# Altium PCB 主板-20190829.PcbDoc (part 1 of 6)
Units mm, origin at the board's own origin, x right, y up, seen from the top; angles counter-clockwise.
Board outline 97.69 x 103.45 mm, 2 copper layers (Top Layer, Bottom Layer); 77 components, 70 nets, 247 pads, 251 vias.
Unrouted connection lines stored in the file: 4.
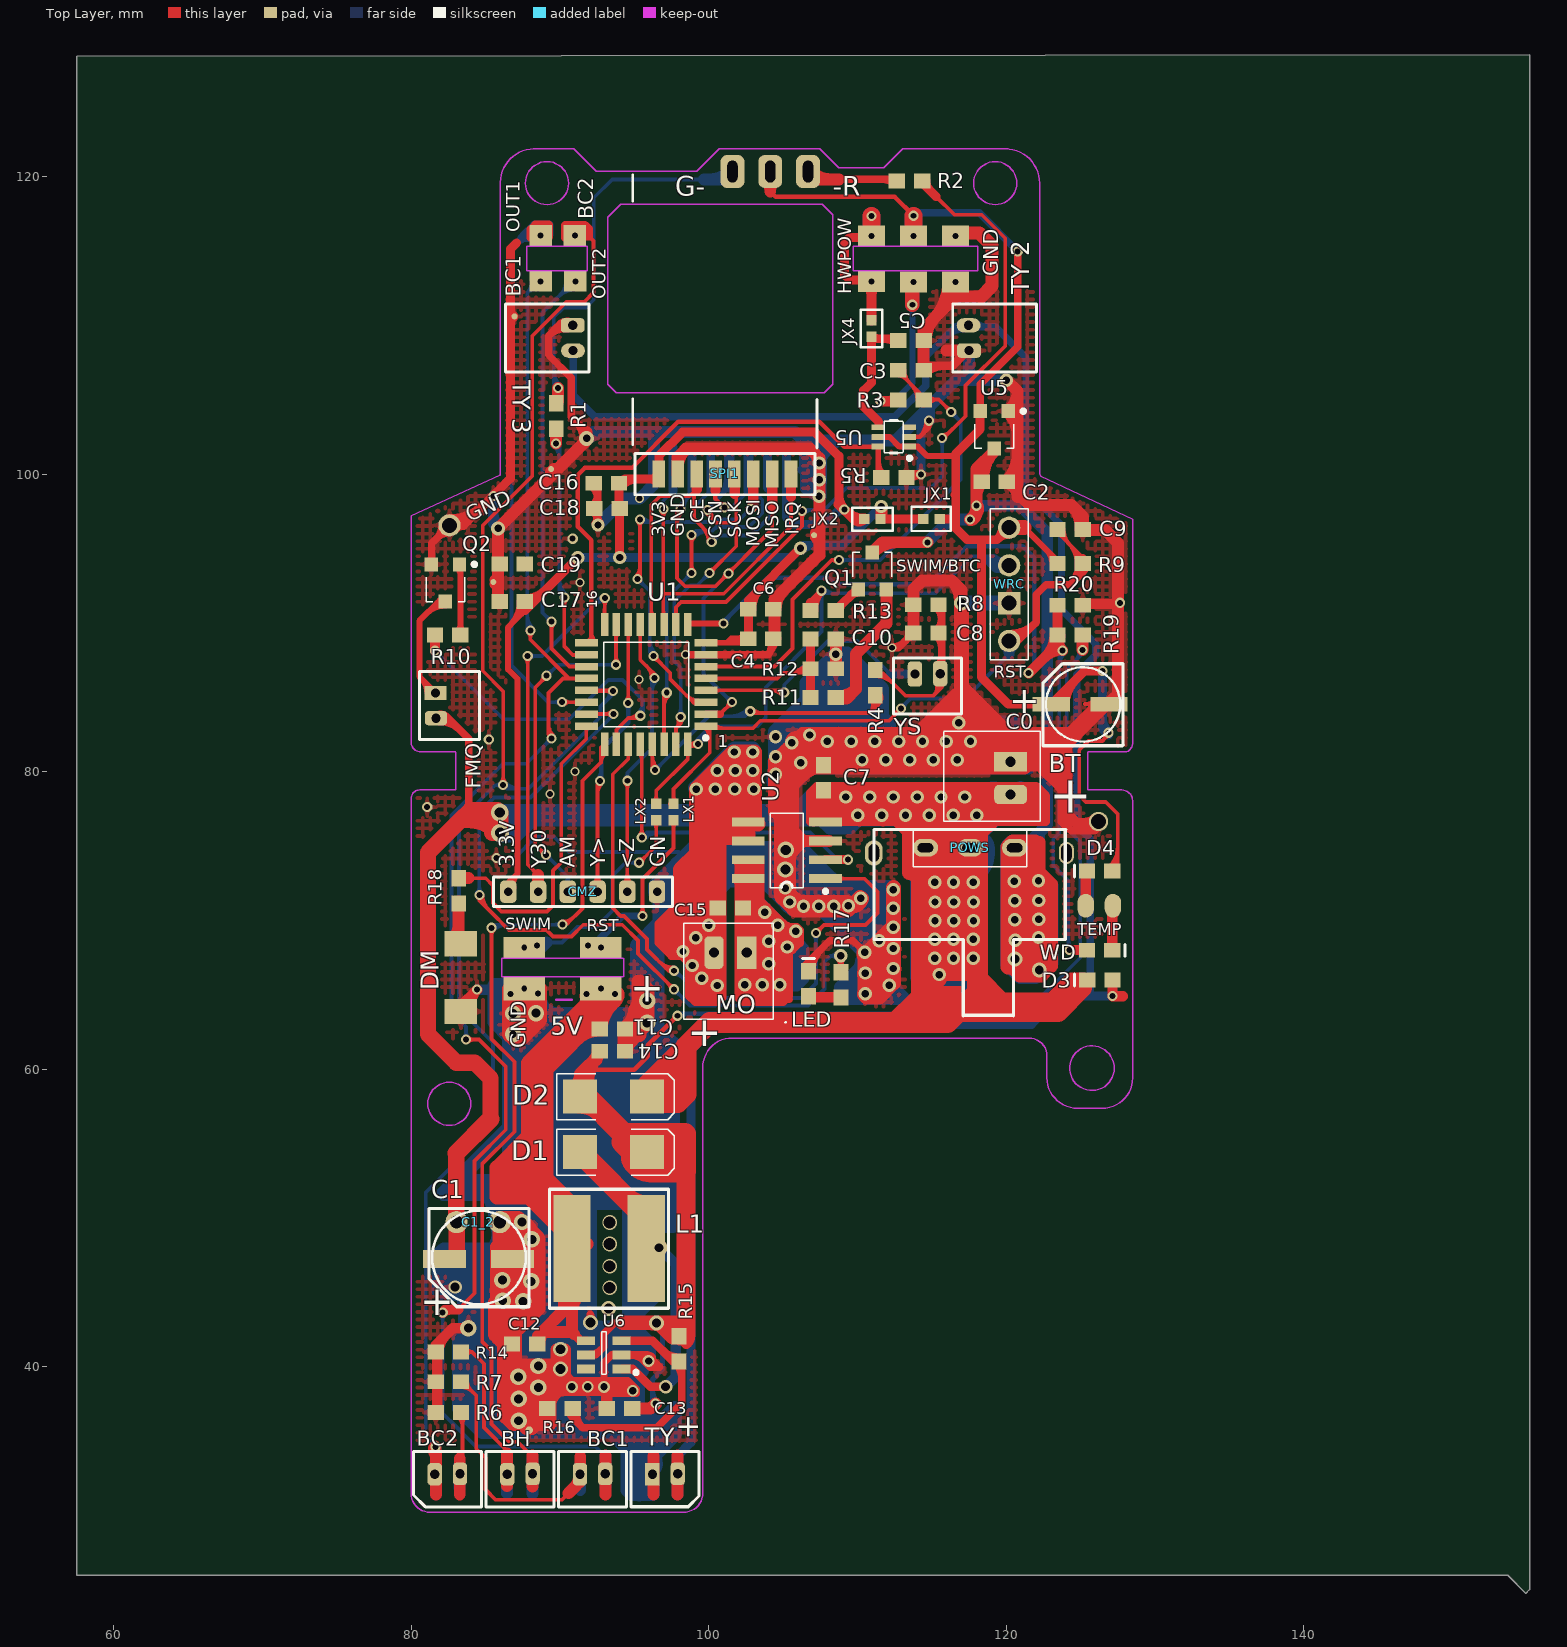
[diagram p0: Top Layer view]
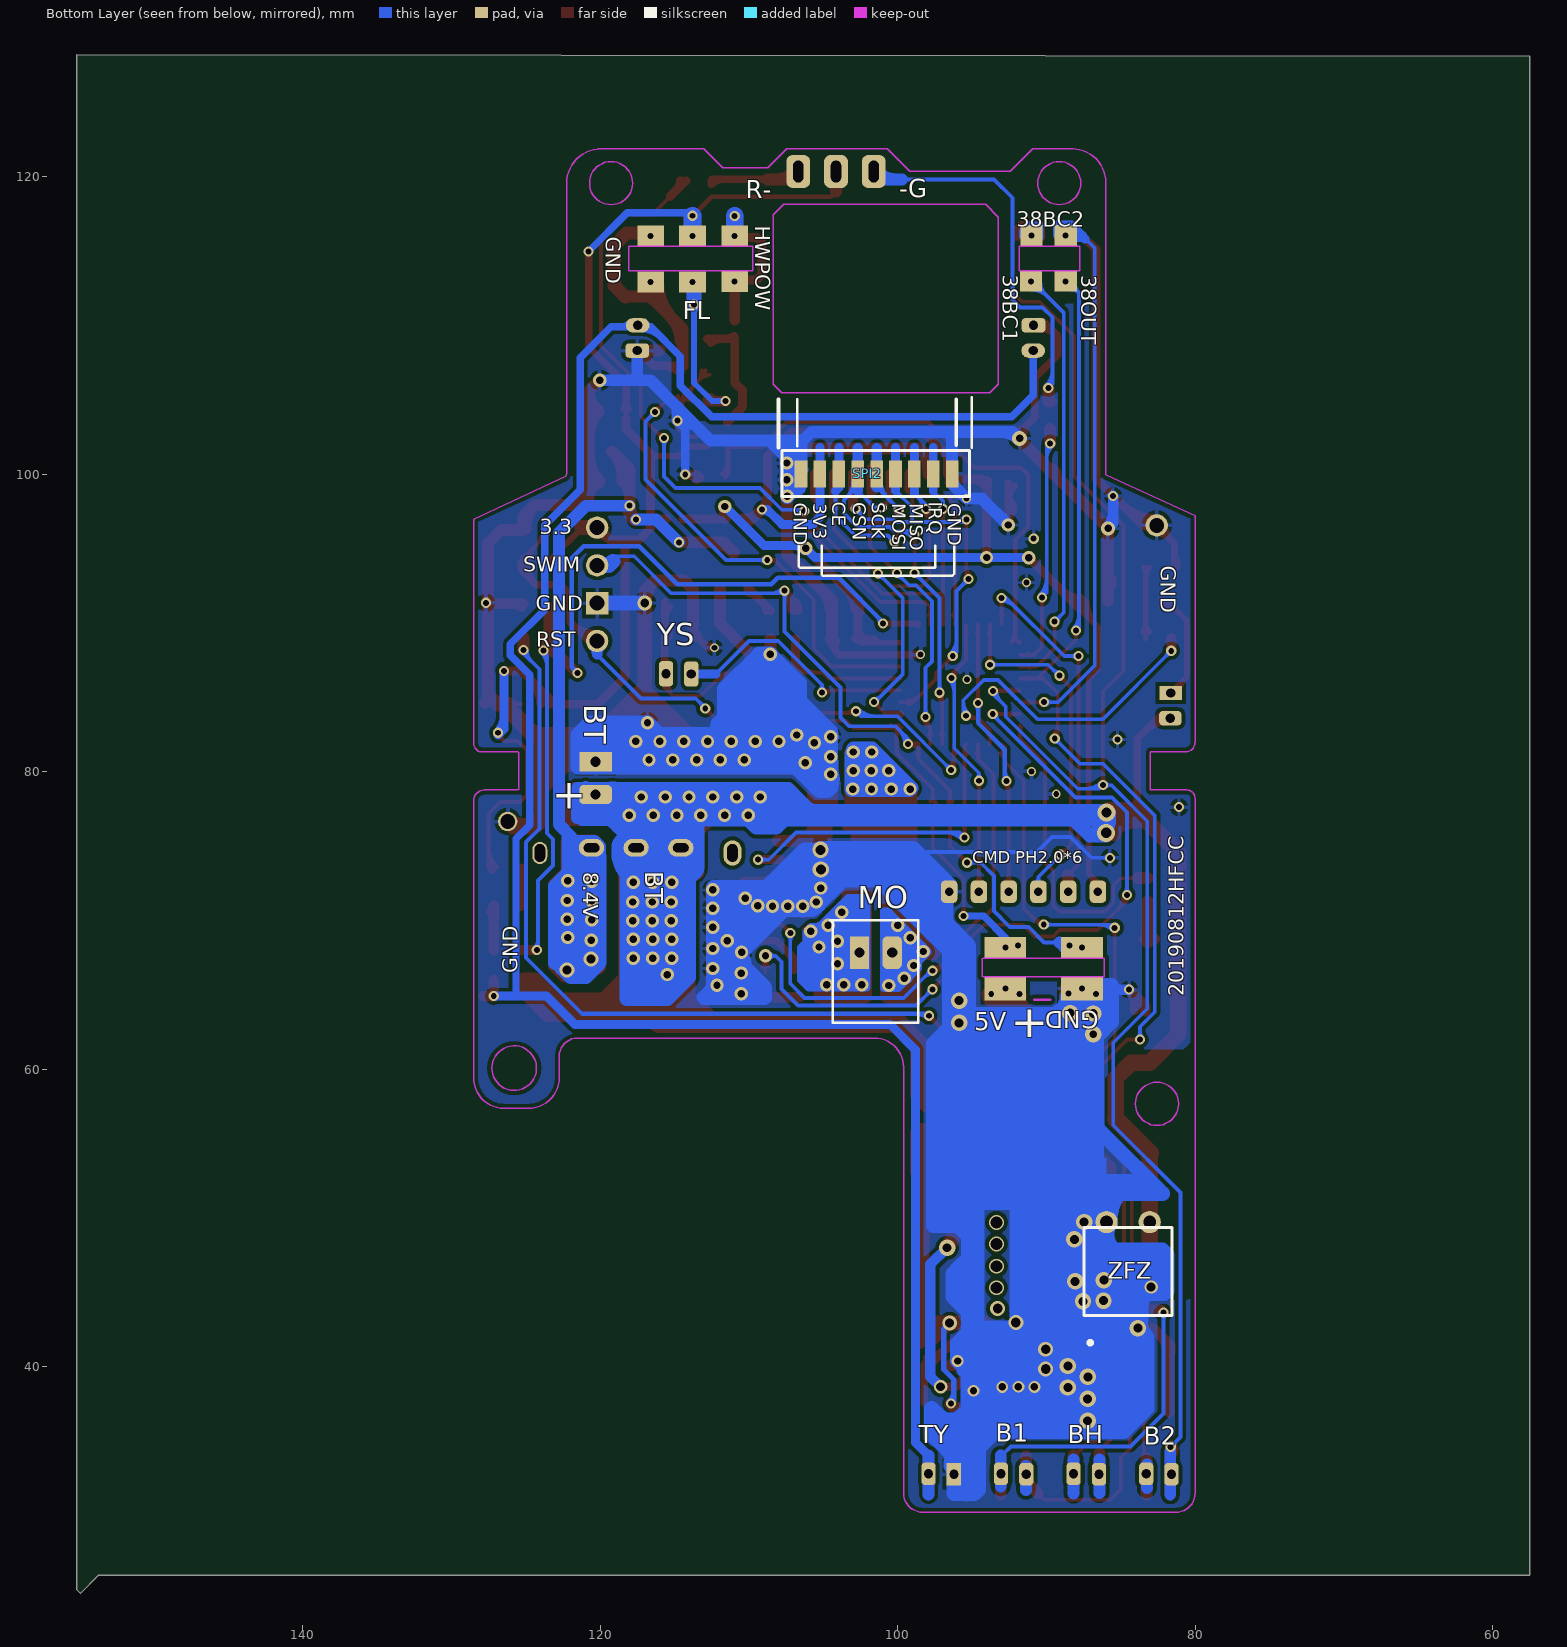
[diagram p1: Bottom Layer view, seen from below]

## Layer stack, top to bottom
Top Layer: signal copper 0.0356
Dielectric: dielectric 0.32, FR-4, Dk 4.8
Bottom Layer: signal copper 0.0356

## Board outline
57.506,128.118 57.506,25.984 153.721,25.984 154.94,24.765 155.194,25.019 155.194,128.219

## Design rules (kind name [scope] priority, off if disabled: settings)
Clearance [All] p1: gap=0.254
PolygonConnect [All] p1: connectstyle=Relief reliefconductorwidth=0.254 reliefentries=4 polygonreliefangle="90 Angle"
RoutingVias [All] p1: holewidth=0.711 width=1.27 viastyle="Through Hole" minholewidth=0.711 minwidth=1.27 maxholewidth=0.711 maxwidth=1.27
SilkscreenOverComponentPads [All] p1: minsilkscreentomaskgap=0.254
SolderMaskExpansion [All] p1: expansion=0.102
Width [All] p1: maxlimit=2 minlimit=0.254 preferedwidth=0.254 minimp=50.000000 maximp=50.000000 favimp=50.000000
27 further rules are at their usual default settings.

## Components (designator, comment, footprint, x,y, rotation, side; value= is the part's Value field where it differs from the comment)
BC1 "1.5*2P" MHDR1X2#1 92.88,32.8 r180 top locked (schematic designator BT)
BC2 "1.5*2P" MHDR1X2#1 83.12,32.8 r180 top locked (schematic designator BT)
BH "1.5*2P" MHDR1X2#1 88,32.8 r180 top locked (schematic designator BT)
BT "PH2.0-W" HDR1X2#1 120.3,78.032 r90 top locked
C0 "47uf  5*5.8" CC3216-1206#1 123.7,84.932 r0 top locked
C1 "220UF" CC3216-1206#2 85.3,46.785 r180 top locked
C1_2 "" HDR1X2#2 76.987,50.285 r180 top locked
C2 "0.1uf" CR1608-0603#1 119.2,99.5 r180 top
C3 "0.01uf" CR1608-0603#1 113.6,107 r180 top
C4 "0.1uf" CR1608-0603#1 103.5,88.951 r0 top locked (schematic designator C6)
C5 "10uf" CR1608-0603#1 113.6,109 r180 top locked (schematic designator C2)
C6 "0.01uf" CR1608-0603#1 103.5,90.932 r180 top locked (schematic designator C7)
C7 "0.1uf" CR1608-0603#1 107.723,79.604 r270 top locked (schematic designator C11)
C8 "0.01uf" CR1608-0603#1 114.6,89.332 r0 top locked
C9 "0.1uf" CR1608-0603#1 124.3,96.3 r180 top locked
C10 "0.01uf" CR1608-0603#1 107.7,88.932 r180 top locked
C11 "10uf" CR1608-0603#1 93.523,62.7 r0 top locked
C12 "10uf" CR1608-0603#1 87.63,41.529 r180 top locked
C13 "1uf" CR1608-0603#1 94,37.2 r180 top locked
C14 "10uf" CR1608-0603#1 93.523,61.211 r0 top locked
C15 "0.1uf" CR1608-0603#1 101.46,70.85 r0 top locked (schematic designator C4)
C16 "0.1uf" CR1608-0603#1 93.116,99.4 r0 top locked (schematic designator C4)
C17 "10uf" CR1608-0603#1 86.792,91.45 r180 top (schematic designator R6)
C18 "0.01uf" CR1608-0603#1 93.167,97.7 r0 top locked (schematic designator C4)
C19 "10uf" CR1608-0603#1 86.792,93.965 r180 top (schematic designator R6)
CMZ "CMD PH2.0*6" MHDR1X7 94.15,71.944 r180 top locked
D1 "SS24" DSO-C2/X2.3 93.6,54.43 r0 top locked
D2 "SS24" DSO-C2/X2.3 93.6,58.166 r0 top locked (schematic designator D3)
D3 "SS14" CC1608-0603 126.3,66 r0 top locked (schematic designator D8)
D4 "SS14" CC1608-0603 126.289,73.33 r0 top (schematic designator R4)
DM "3*4*2小龟按钮" HDR1X2#3 85.344,70.032 r90 top locked (schematic designator FW)
FMQ "1.5*2P" MHDR1X2#2 81.636,85.141 r270 top (schematic designator BT)
JX1 "" CR1005-0402 114.986,97 r0 top (schematic designator R8)
JX2 "" CR1005-0402 111,97 r180 top
JX4 "" CR1005-0402 110.947,109.8 r90 top locked (schematic designator R8)
L1 "22UH" L7 93.3,47.94 r180 top locked
LED "LED-DM" CC1608-0603 106.7,65.75 r270 top locked
LX1 "4.7K" CR1005-0402 97.638,77.292 r90 top locked (schematic designator R8)
LX2 "4.7K" CR1005-0402 96.469,77.292 r90 top locked (schematic designator R8)
MO "PH2.0-W" HDR1X2#4 103,67.843 r180 top locked (schematic designator BT)
POWS "SS12F23" HDR1X3 120.114,74.892 r180 top locked (schematic designator WS)
Q1 "ME6209  18V  3UA" SO-G3/C2.5 111,93.5 r0 top (schematic designator U4)
Q2 "ME6209  18V  3UA" SO-G3/C2.5 82.3,92.7 r180 top locked (schematic designator U5)
R1 "4.7K" CR1608-0603#1 89.752,103.919 r270 top locked
R2 "4.7K" CR1608-0603#1 113.5,119.732 r0 top locked
R3 "1K" CR1608-0603#1 113.6,105 r180 top locked
R4 "1K" CR1608-0603#1 111.2,86 r270 top locked
R5 "10K" CR1608-0603#1 112.446,99.797 r180 top (schematic designator R7)
R6 "36K" CR1608-0603#1 82.5,36.932 r180 top
R7 "36K" CR1608-0603#1 82.5,38.989 r0 top (schematic designator R6)
R8 "1M" CR1608-0603#1 114.6,91.232 r180 top
R9 "10K" CR1608-0603#1 124.3,94 r180 top locked
R10 "1K" CR1608-0603#2 82.45,89.2 r180 top locked (schematic designator R7)
R11 "1M" CR1608-0603#1 107.7,85 r0 top locked
R12 "500K" CR1608-0603#1 107.7,86.932 r180 top locked
R13 "4.7K" CR1608-0603#1 107.7,90.856 r180 top
R14 "500K" CR1608-0603#1 82.5,41 r0 top (schematic designator R21)
R15 "100K" CR1608-0603#1 98,41.2 r270 top locked
R16 "7.89K" CR1608-0603#1 90,37.2 r180 top locked
R17 "1K" CR1608-0603#1 108.9,65.681 r90 top locked (schematic designator R19)
R18 "10K" CR1608-0603#1 83.2,72 r90 top locked
R19 "10K" CR1608-0603#1 124.3,89.2 r180 top locked (schematic designator R9)
R20 "4.7K" CR1608-0603#1 124.3,91.2 r180 top locked
SPI1 "SI24R1" MHDR1X8 105.537,100.032 r180 top locked
SPI2 "NRF24RL01" MHDR1X8 97.6,100.032 r0 bottom locked
TY "1.5*2P" MHDR1X2#3 97.75,32.8 r180 top locked (schematic designator BT)
"TY 2" "1.5*2P" MHDR1X2#4 117.475,109.855 r270 top locked (schematic designator BT)
"TY 3" "1.5*2P" MHDR1X2#4 90.881,108.483 r90 top locked (schematic designator BT)
U1 "STM8L151K4T6" TQFP32 95.8,85.877 r180 top locked
U2 "MX380（RZ7889D）" SO8 105.254,74.722 r90 top locked
U5 "ME6209  18V  3UA" SO-G3/C2.5 119.2,103 r180 top locked
U5 "BL1551" SOT23-6_N 112.446,102.514 r180 top
U6 "SX1308  B6286" SOT23-6_M 92.95,40.8 r180 top locked
WD "3V" CC1608-0603 126.289,68 r180 top locked (schematic designator D8)
WRC "2.54HP" HDR1X4 120.2,88.8 r90 top locked (schematic designator SX)
YS "1.5*2P" MHDR1X2#5 115.4,86.6 r180 top locked (schematic designator BT)
ZFZ "5.8*5.8zs" DPDT-6 84.506,46.456 r90 bottom locked

## Footprints (in the part's own frame and the unit in brackets; to place one, negate y for a bottom-side part, rotate by r counter-clockwise, add the part's x,y. Pads: shape width x height; smd on the part's side, far side on the other; paste and mask are expansions set on the pad)
CC1608-0603 [mm] "Chip Capacitor; Body 1.6 x 0."
  rect 1.1x1 smd: 1(-0.85,0) 2(0.85,0)
  silkscreen extent -1.7,-0.4 -1.7,0.4
CC3216-1206#1 [mm]
  rect 2.5x1 smd: 1(-0.662,-0.386) 2(3.213,-0.386)
CC3216-1206#2 [mm]
  rect 2.9x1.2 smd: 1(-1.5,-0.45) 2(3.068,-0.455)
CR1005-0402 [mm]
  rect 0.7x0.7 smd: 1(-0.55,0) 2(0.55,0)
CR1608-0603#1 [mm]
  rect 1.1x1 smd: 1(-0.85,0) 2(0.85,0)
CR1608-0603#2 [mm]
  rect 1.1x1 smd: 1(-0.85,0)
  rect 1.1x1 smd paste+0: 2(0.85,0)
DPDT-6 [mm] "Double-Pole, Double-Throw Switch; 6 Leads"
  silkscreen extent -4.96,-2.95 2.92,2.95
DSO-C2/X2.3 [mm] "DO-214-AA/SMB; 2 C-Bend Leads; Body 5.3 x 3.6 mm, inc. leads (LxW)"
  rect 2.3x2.3 smd: 1(-2.25,0) 2(2.25,0)
  silkscreen extent -3.8,-1.55 4.1,1.55
HDR1X2#1 [mm]
  rrect50% 1.3x2.2 hole 0.68: 1(0.44,0)
  rect 1.3x2.2 hole 0.68: 2(2.642,0.003)
  silkscreen extent -1.34,-1.99 4.68,4.49
HDR1X2#2 [mm] "Connector; Header; 2 Position"
  round 1.5 hole 0.86: 1(-8.963,0.558) 2(-6.063,0.558)
HDR1X2#3 [mm]
  rect 1.7x2.2 smd: 1(-6.147,2.004) 2(-1.6,2.004)
HDR1X2#4 [mm]
  rect 1.3x2.2 hole 0.68: 1(0.44,0)
  rrect50% 1.3x2.2 hole 0.68: 2(2.642,0.003)
  silkscreen extent -1.34,-1.99 4.68,4.49
HDR1X3 [mm]
  oval 1.7x1.2 hole 0.6 slot 1.05 at 0 deg: 1(-0.46,0) 2(2.54,0) 3(5.54,0)
  silkscreen extent -1.27,-1.27 6.35,1.27
HDR1X4 [mm]
  round 1.5 hole 1: 1(0,0) 3(5.08,0) 4(7.62,0)
  rect 1.5x1.5 hole 1: 2(2.54,0)
  silkscreen extent -1.27,-1.27 8.89,1.27
L7 [mm]
  rect 2.5x7.2 smd: 1(2.5,0) 2(-2.5,0)
  silkscreen extent -4,-4 4,4
MHDR1X2#1 [mm]
  rrect50% 0.96x1.5 hole 0.62: 1(-0.164,0) 2(1.536,0.026)
  silkscreen extent -1.6,-1.49 2.97,2.22
MHDR1X2#2 [mm]
  rect 0.96x1.5 hole 0.62: 1(-0.164,0)
  rrect50% 0.96x1.5 hole 0.62: 2(1.536,0.026)
  silkscreen extent -1.6,-1.07 2.97,2.97
MHDR1X2#3 [mm]
  rrect50% 0.96x1.5 hole 0.62: 1(-0.164,0)
  rect 0.96x1.5 hole 0.62: 2(1.536,0.026)
  silkscreen extent -1.6,-1.52 2.97,2.22
MHDR1X2#4 [mm]
  oval 0.96x1.6 hole 0.62: 1(-0.164,0)
  rrect50% 0.96x1.6 hole 0.62: 2(1.536,0.026)
  silkscreen extent -1.6,-1.07 2.97,4.55
MHDR1X2#5 [mm]
  rrect50% 0.96x1.7 hole 0.62: 1(-0.164,0) 2(1.536,0.026)
  silkscreen extent -1.6,-1.07 2.97,2.72
MHDR1X7 [mm] "Connector; Header; 7 Position"
  rrect50% 1.1x1.5 hole 0.58: 2(-2.38,0) 3(-0.38,0) 4(1.62,0) 5(3.62,0) 6(5.62,0) 7(7.62,0)
  silkscreen extent -3.41,-1 8.62,1
MHDR1X8 [mm] "Connector; Header; 8 Position"
  rect 0.85x1.8 smd: 1(0,0) 2(1.27,0) 3(2.54,0) 4(3.81,0) 5(5.08,0) 6(6.35,0) 7(7.62,0) 8(8.89,0)
  silkscreen extent -1.6,-1.37 10.49,1.4
SO8 [mm]
  rect 0.6x2.2 smd: 1(-1.905,-2.6) 2(-0.635,-2.6) 3(0.635,-2.6) 4(1.905,-2.6) 5(1.905,2.6) 6(0.635,2.6) 7(-0.635,2.6) 8(-1.905,2.6)
  silkscreen extent -2.88,-2.72 2.5,1.1
SO-G3/C2.5 [mm]
  rect 0.9x0.95 smd: 1(-0.95,-1.25) 2(0.95,-1.25) 3(0,1.25)
  silkscreen extent -1.3,-0.38 1.3,1.25
SOT23-6_M [mm]
  rect 1.2x0.59 smd: 1(-1.2,0.95) 2(-1.2,0) 3(-1.2,-0.95) 4(1.2,-0.95) 5(1.2,0) 6(1.2,0.95)
  silkscreen extent -2.29,-1.55 0.15,1.31
SOT23-6_N [mm] "SOT23, 6-Leads, Body 2.9x1.6mm, Pitch 0.95mm, Lead Span 2.7mm, IPC Medium Density"
  rect 0.9x0.39 smd: 1(-1.05,0.65) 2(-1.05,0) 3(-1.05,-0.65) 4(1.05,-0.65) 5(1.05,0) 6(1.05,0.65)
  silkscreen extent -1.19,-1.09 0.63,1.55
TQFP32 [mm] "QFP; 32 Leads; Body 7 x 7 mm; Pitch 0.8 mm"
  rect 1.55x0.5 smd: 1(-4.025,2.8) 2(-4.025,2) 3(-4.025,1.2) 4(-4.025,0.4) 5(-4.025,-0.4) 6(-4.025,-1.2) 7(-4.025,-2) 8(-4.025,-2.8) 18(4.025,-2) 19(4.025,-1.2) 20(4.025,-0.4) 21(4.025,0.4) 22(4.025,1.2) 23(4.025,2) 24(4.025,2.8)
  rect 0.5x1.55 smd: 9(-2.8,-4.025) 10(-2,-4.025) 11(-1.2,-4.025) 12(-0.4,-4.025) 13(0.4,-4.025) 14(1.2,-4.025) 15(2,-4.025) 16(2.8,-4.025) 26(2,4.025) 27(1.2,4.025) 28(0.4,4.025) 29(-0.4,4.025) 30(-1.2,4.025) 31(-2,4.025) 32(-2.8,4.025)
  rect 1.55x0.5 smd mask+0.102: 17(4.025,-2.8)
  rect 0.5x1.55 smd paste+0: 25(2.8,4.025)
  silkscreen extent -4.13,-2.85 2.85,3.72

## Part data
D3 WD: library part "Cap Semi", "Capacitor (Sem"
LX2: library part Res3
U1: library part ST72F324K4T6
ZFZ: library part SW-DPST

## Free pads (board coordinates)
  round 0.4 smd: 0(85.522,92.761) 0(86.944,110.617) 0(89.408,100.355) 0(107.086,95.91)
  rect 2.8x1.6 hole 0.4: 0(87.6,65.432)
  rect 2.8x1.4 hole 0.4: 0(87.6,68.182) 0(92.75,68.182)
  round 0.5 smd: 0(87.935,35.738)
  rect 1.5x1.4 hole 0.4: 0(88.7,112.98) 0(88.7,116.053) 0(91,116.053) 0(91.032,112.98)
  rect 2.8x1.6 hole 0.4 mask+0.102: 0(92.75,65.432)
  rect 0.85x1.8 smd far side: 0(96.33,100.032)
  rrect50% 1.6x2.2 hole 0.68 slot 1.46 at 90 deg: 0(101.6,120.36) 0(104.14,120.36) 0(106.68,120.36)
  rect 1.8x1.4 hole 0.4: 0(110.95,112.956) 0(110.95,116.032) 0(113.78,112.932) 0(113.78,116.032) 0(116.6,112.932) 0(116.6,116.032)
  oval 1.2x1.7 hole 0.7 slot 1.2 at 90 deg: 3(111.103,74.545)
  round 1.5 hole 1 paste+0: 4(82.575,96.571)
  oval 1x1.5 hole 0.7 slot 1.2 at 90 deg: 4(124.051,74.545)
  oval 1.1x1.6 smd: 4(125.349,71) 4(127.178,71)
  round 1.3 hole 1 paste+0: 4(126.213,76.657)

## Via types
v1: diameter 0.9, hole 0.5, Top Layer to Bottom Layer, 107 vias
v2: diameter 0.68, hole 0.4, Top Layer to Bottom Layer, 87 vias
v3: diameter 1.1, hole 0.6, Top Layer to Bottom Layer, tented both sides, 17 vias
v4: diameter 0.6, hole 0.4, Top Layer to Bottom Layer, 7 vias
v5: diameter 0.8, hole 0.5, Top Layer to Bottom Layer, 5 vias
v6: diameter 0.7, hole 0.4, Top Layer to Bottom Layer, 5 vias
v7: diameter 1, hole 0.6, Top Layer to Bottom Layer, 4 vias
v8: diameter 1, hole 0.8, Top Layer to Bottom Layer, tented both sides, 4 vias
v9: diameter 1, hole 0.65, Top Layer to Bottom Layer, tented both sides, 4 vias
v10: diameter 1.2, hole 0.7, Top Layer to Bottom Layer, tented both sides, 2 vias
v11: diameter 1.1, hole 0.68, Top Layer to Bottom Layer, 2 vias
v12: diameter 0.8, hole 0.4, Top Layer to Bottom Layer, 2 vias
v13: diameter 0.9, hole 0.6, Top Layer to Bottom Layer, tented bottom, 1 vias
v14: diameter 0.95, hole 0.5, Top Layer to Bottom Layer, 1 vias
v15: diameter 0.9, hole 0.6, Top Layer to Bottom Layer, tented both sides, 1 vias
v16: diameter 1, hole 0.5, Top Layer to Bottom Layer, 1 vias
v17: diameter 1.1, hole 0.5, Top Layer to Bottom Layer, tented both sides, 1 vias

## Nets (pads, with @x,y where several pads share a name; then routed paths per layer and width w, separated by ;. In a path a pad name is that pad's centre, name@x,y a point inside that pad or via, vN(x,y) a via of type N, cw(c..) or ccw(c..) an arc to the next point about the centre after c; other vN are vias at no path point)
1D-: D1.1 L1.2 U6.1 | length 27.2
  Top Layer w0.59: U6.1@94.2,39.85 94.897,39.85 96.088,38.659 v13(97.104,38.659)
  Top Layer w0.8: L1.2@95.8,49.98 95.8,49.081 L1.2@96.23,48.652 ; L1.2@96.23,49.421 ccw(c98.088,49.421) L1.2@96.774,48.108 ; L1.2@96.23,49.476 L1.2@96.23,48.652 ; L1.2@96.683,48.151 cw(c96.733,48.652) L1.2@96.23,48.652 ; L1.2@96.262,48.62 cw(c95.644,48.002) 96.518,48.002 ccw(c95.644,48.002) L1.2@96.262,48.62
  Top Layer w1.5: D1.1@91.35,54.43 L1.2@95.8,49.98 ; 94.417,51.363 ccw(c95.8,52.746) L1.2@95.8,50.79
  Bottom Layer w0.7: v3(96.668,48.002) 97.79,46.879 97.79,39.345 v13(97.104,38.659)
1R-1: R15.2 R16.1 U6.3 | length 21.1
  Top Layer w0.5: R16.1@90.656,37.252 ccw(c91.415,37.09) 90.866,36.54 ; R16.1@90.673,37.023 cw(c90.246,36.596) 90.85,36.596 cw(c91.454,36.596) R16.1@91.027,37.023 ; R16.1@90.85,37.2 90.85,36.556 91.516,35.89 ; R16.1@91.144,37.148 ccw(c92.487,36.861) 91.516,35.89 ; R15.2@97.823,40.123 cw(c96.922,39.222) 98.196,39.222 ; R15.2@98.044,40.306 98.196,40.154 98.196,37.567 96.52,35.89 91.516,35.89
  Top Layer w0.59: U6.3@94.15,41.75 96.223,41.75 R15.2@97.607,40.366 ; 96.921,41.052 ccw(c98,42.132) R15.2@98,40.605
3-BH: BH.2 R14.2 | length 13.9
  Top Layer w0.254: R14.2@83.45,41 84.095,41 ; R14.2@83.711,40.794 cw(c84.095,40.539) 84.095,41 ; R14.2@83.711,41.206 ccw(c84.095,41.461) 84.095,41 ; 86.614,34.181 84.887,35.909 84.887,40.208 84.095,41
  Top Layer w0.8: 86.436,31.979 86.436,34.176
  Bottom Layer w0.8: 86.436,31.496 86.436,33.757
3-WZ: BC2.1 R6.1 | length 13.7
  Top Layer w0.254: BC2.1@83.034,33.32 ccw(c82.031,34.323) 83.45,34.323 ; R6.1@83.136,36.668 cw(c82.379,35.91) 83.45,35.91 ; BC2.1@83.214,33.14 ccw(c82.644,33.71) 83.45,33.71 ; BC2.1@83.24,32.8 83.45,33.01 R6.1@83.45,36.932 ; BC2.1@83.45,33.522 ccw(c83.735,33.522) BC2.1@83.534,33.32 ; 83.45,36.152 cw(c84.18,36.152) R6.1@83.664,36.668
  Top Layer w0.8: 83.261,31.42 83.261,33.833
  Bottom Layer w0.3: BC2.1@83.064,32.284 cw(c82.625,31.793) 83.284,31.793 ; BC2.1@83.284,32.8 83.284,31.793 ; BC2.1@83.504,32.284 ccw(c83.943,31.793) 83.284,31.793
  Bottom Layer w0.8: 83.24,31.836 BC2.1@83.24,33.426
3.3V: C0.1 C4.1 C6.2 C16.2 C17.1 C18.2 CMZ.7 D4.2 JX1.1 JX1.2 JX2.1 JX2.2 pad.0@104.14,120.36 pad.0@113.78,116.032 R9.2 SPI1.8 SPI2.7 U1.8 U5.1@113.495,101.864 U5.2@118.25,104.25 U5.5 WRC.4 | length 228.2
  Top Layer w0.254: v2@126.661,82.606 cw(c125.99,82.544) 126.467,82.067 ; v2(126.873,82.626) 126.873,82.474 126.467,82.067 ; D4.2@126.925,73.594 ccw(c125.518,75.001) 127.508,75.001 ; D4.2@127.105,73.414 ccw(c126.131,74.388) 127.508,74.388 ; D4.2@127.139,73.33 127.508,73.699 127.508,77.165 126.695,77.978 125.374,77.978 124.917,78.435 124.917,81.458 125.527,82.067 126.467,82.067 ; D4.2@127.284,73.234 ccw(c126.744,73.774) D4.2@127.508,73.774
  Top Layer w0.3: 104.14,119.024 104.496,118.669 112.497,118.669 v2(113.78,117.385) ; v2@113.59,117.385 ccw(c113.131,117.385) 113.456,117.71 ccw(c113.78,118.034) v2@113.78,117.575
  Top Layer w0.4: CMZ.7@86.53,71.944 CMZ.7@86.53,72.535 ; 86.615,89.815 ccw(c84.979,91.45) C17.1@87.292,91.45 ; CMZ.7@86.802,72.364 cw(c87.074,72.584) 86.827,72.831 ; 86.827,72.831 CMZ.7@86.53,72.535 ; CMZ.7@86.872,72.218 cw(c87.867,72.432) 87.147,73.152 ; 87.297,90.498 ccw(c86.345,91.45) C17.1@87.692,91.45 ; 87.655,90.856 86.512,89.713 86.512,86.893 87.147,86.258 87.147,73.152 ; C16.2@93.966,99.593 94.056,99.593 C16.2@94.158,99.492 ; SPI1.8@96.647,99.746 SPI1.8@96.647,100.032 ; U1.8@99.825,88.677 100.711,88.677 ; 101.216,88.677 ccw(c101.216,90.335) 102.388,89.163 cw(c101.876,89.675) 101.876,88.951 cw(c101.876,88.227) C4.1@102.388,88.739 ; C4.1@102.667,88.873 102.472,88.677 100.711,88.677 ; C4.1@102.95,88.951 101.518,88.951 101.244,88.677 100.711,88.677 ; U5.5@111.395,102.514 112.166,102.514 112.816,101.864 U5.1@113.495,101.864 114.061,101.864 114.706,101.219 116.611,101.219 ; 121.207,96.42 R9.2@123.539,94.089 ; 122.727,94.9 cw(c121.827,94) R9.2@123.1,94 ; CMZ.7@86.53,72.535 87.147,73.152
  Top Layer w0.5: U5.2@118.109,104.416 ccw(c117.767,104.758) 118.25,104.758 ccw(c118.733,104.758) U5.2@118.391,104.416 ; U5.2@118.25,104.25 118.25,106.055 120.777,108.582 v2(120.777,114.986)
  Top Layer w0.6: 87.655,90.856 v1(91.186,94.386) ; C17.1@87.692,91.65 ccw(c87.692,93.48) 88.985,92.186 ; C16.2@93.966,99.593 93.966,97.866 94.017,97.866 v1(94.017,94.412) ; C16.2@94.158,99.259 cw(c95.211,98.205) 95.211,99.695 ; C16.2@94.158,99.492 94.361,99.695 96.31,99.695 SPI1.8@96.647,100.032 96.647,101.239 98.252,102.845 107.137,102.845 108.758,101.224 108.758,97.998 v2(109.118,97.638) ; 96.012,99.695 cw(c96.012,98.921) SPI1.8@96.559,99.468 ; C6.2@102.509,90.791 cw(c102.127,90.409) 102.667,90.409 ; C6.2@102.509,91.073 ccw(c102.127,91.455) 102.667,91.455 ; C4.1@102.509,89.092 ccw(c102.127,89.474) 102.667,89.474 ; C4.1@102.667,88.873 102.667,91.516 v1(106.172,95.021) ; C6.2@102.9,90.932 cw(c104.873,90.932) 103.478,92.327 ; 108.758,98.605 ccw(c110.086,98.605) v2@109.147,97.666 ; JX2.1@111.608,97 JX1.1@114.436,97 ; JX1.2@115.536,97 116.561,97 ; 116.561,98.628 116.611,98.577 ; 118.25,103.75 118.25,103.035 116.611,101.397 116.611,98.577 ; 118.339,95.606 118.339,86.36 120.153,84.546 C0.1@123.038,84.546 ; WRC.4@119.75,96.42 cw(c118.664,96.42) 119.432,95.652 cw(c120.2,94.884) WRC.4@120.2,95.97 ; WRC.4@120.2,96.42 119.386,95.606 117.373,95.606 116.611,96.368 116.611,98.577 ; C0.1@123.138,84.546 C0.1@123.038,84.546 ; C0.1@123.388,84.546 cw(c124.233,84.546) 123.635,85.143 ; C0.1@123.988,84.546 cw(c126.282,84.546) 124.66,86.168 ; v2(126.467,86.792) 125.284,86.792 C0.1@123.038,84.546
  Top Layer w0.7: 108.758,97.998 109.753,97.003 ; v2@109.266,97.49 ccw(c110.449,98.674) JX2.2@110.449,97 cw(c110.103,97.352) 109.753,97.003 ; JX2.2@110.449,97.003 109.753,97.003
  Top Layer w0.8: pad.0@103.857,119.777 cw(c103.174,119.094) 104.14,119.094 cw(c105.106,119.094) pad.0@104.423,119.777 ; 104.14,119.024 pad.0@104.14,120.36 ; JX2.1@111.608,97.079 v1@111.608,97.815
  Top Layer w1: WRC.4@120.2,96.42 121.207,96.42
  Top Layer w1.2: pad.0@113.78,116.032 v2(113.78,117.385)
  Bottom Layer w0.5: v2(113.78,117.385) 113.97,117.577 118.186,117.577 v2(120.777,114.986) ; v2@113.844,117.322 cw(c114.459,116.707) 114.459,117.577
  Bottom Layer w0.6: v1@91.059,94.412 v1(94.017,94.412) 105.562,94.412 106.375,95.225 108.991,95.225 v1(111.608,97.841) ; 105.22,101.803 105.22,97.116 105.694,96.642 107.766,96.642 108.762,97.638 v2(109.118,97.638) ; v1@106.278,94.915 cw(c107.025,94.169) 107.025,95.225 ; 108.442,97.317 cw(c109.118,96.641) v2@109.118,97.598 ; WRC.4@120.2,96.42 WRC.4@120.2,96.716 ; 126.467,83.704 ccw(c127.951,83.704) v2@126.901,82.654 ; v2(126.467,86.792) 126.467,82.88 126.873,82.474 v2(126.873,82.626) ; 126.545,82.802 ccw(c126.873,83.131) v2@126.873,82.666
  Bottom Layer w1.2: pad.0@113.78,116.032 v2(113.78,117.385)
3V3: 
5V: C11.1 C12.1 L1.1 pad.0@92.75,65.432 U6.4 | length 117.8
  Top Layer w0.6: 90.957,42.189 91.397,41.75 U6.4@91.75,41.75
  Top Layer w0.8: C12.1@88.519,41.529 88.519,42.062 88.798,42.342 ; 88.519,52.349 88.519,53.264 ; C12.1@88.63,41.529 cw(c90.186,41.529) 89.086,42.629 ; L1.1@90.199,44.989 cw(c88.736,43.526) 90.805,43.526 ; 90.272,43.738 cw(c91.355,43.738) L1.1@91.044,44.776 ; L1.1@90.633,51.124 cw(c90.246,53.06) 88.849,51.664 90.8,49.713 90.8,48.519 L1.1@90.8,47.94 90.272,45.263 90.272,43.815 88.798,42.342 ; 90.805,43.55 cw(c92.841,43.55) L1.1@91.401,44.989 ; L1.1@90.805,45.263 90.805,42.342 ; 90.957,42.189 90.805,42.342 ; 88.519,53.264 88.519,56.325 88.557,56.363 88.557,53.302 88.519,53.264 ; 88.798,42.342 ccw(c89.325,41.815) 88.624,41.563 cw(c89.325,41.815) 88.798,42.342 ; 88.798,42.342 90.805,42.342
  Top Layer w1: 87.884,55.499 85.776,53.391 85.776,51.41 87.63,51.41 87.884,51.664 ; 88.849,51.664 87.884,51.664 ; 88.898,50.421 ccw(c90.158,51.681) L1.1@90.905,50.063 ; 88.925,59.868 92.75,63.692 ; 88.925,60.833 pad.0@92.75,64.658 ; L1.1@89.912,49.407 ccw(c90.799,50.293) L1.1@91.324,49.155 ; L1.1@90.05,50.291 ccw(c86.644,50.296) 89.052,52.705 ; L1.1@90.486,50.971 cw(c89.518,53.068) 87.884,51.435 ; L1.1@90.8,48.519 87.884,51.435 ; L1.1@90.8,49.713 90.8,50.957 89.052,52.705 ; L1.1@90.926,48.393 ccw(c91.439,48.906) L1.1@91.743,48.247 ; 91.146,62.088 cw(c92.623,60.611) C11.1@92.623,62.7 ; 91.531,64.073 ccw(c90.529,65.075) pad.0@91.946,65.075 ; pad.0@91.804,64.925 ccw(c91.761,65.653) pad.0@92.306,65.169 ; 91.948,64.469 cw(c92.822,64.469) pad.0@92.322,65.186 ; pad.0@91.948,64.846 91.948,64.491 87.884,60.427 87.884,51.664 ; 92.75,63.692 ccw(c91.696,64.746) pad.0@93.073,65.317 ; pad.0@92.943,65.238 ccw(c93.701,65.996) pad.0@93.701,64.925 ; pad.0@93.042,65.373 ccw(c93.891,65.906) pad.0@93.667,64.929 ; pad.0@93.138,65.22 cw(c92.392,64.474) 93.447,64.474 ; 93.405,64.348 ccw(c95.053,62.7) C11.1@92.723,62.7 ; 87.884,51.435 87.884,51.664 ; 89.052,52.705 89.052,56.363 ; 89.052,56.363 89.052,59.995 88.621,60.427 88.138,60.427 88.557,60.008 88.557,56.363 89.052,56.363 ; C11.1@92.723,62.7 cw(c93.26,63.182) 92.75,63.692 ; C11.1@92.723,62.7 cw(c93.26,63.182) 92.75,63.692 ; 92.75,63.692 pad.0@92.75,64.658 ; 92.75,63.692 93.447,64.389 93.447,64.735 pad.0@92.75,65.432 pad.0@92.75,64.658 ; pad.0@93.447,64.824 cw(c93.952,64.824) 93.595,65.181 ccw(c93.952,64.824) pad.0@93.447,64.824 ; 93.651,64.594 ccw(c93.17,65.075) 93.851,65.075 cw(c93.17,65.075) 93.651,64.594
  other v6: 91.796,65.075 93.701,65.075
8.4V: C2.2 POWS.1 Q1.3 U5.3@119.2,101.75 | length 172.9
  Top Layer w0.4: v1@122.25,72.746 122.452,72.746 122.795,72.746 ccw(c122.795,72.242) v1@122.38,72.528
  Top Layer w0.8: Q1.3@111,94.75 111.683,95.433 v2(114.706,95.433) ; Q1.3@111.035,94.74 cw(c112.71,93.065) 112.71,95.433 ; v2(117.577,96.977) 118.008,97.409 ; v2@117.586,96.918 ccw(c117.512,97.409) 118.008,97.409 ; v2@117.619,96.935 ccw(c116.679,97.875) v2@118.008,97.875 ; v2@117.77,97.17 ccw(c117.048,97.892) v2@118.068,97.892 ; 118.008,98.555 cw(c119.245,98.555) C2.2@118.371,99.429 ; v2@118.058,97.925 cw(c117.72,97.697) 118.008,97.409 ; C2.2@118.366,99.576 cw(c119.045,100.358) 118.008,100.358 ; C2.2@118.499,99.512 cw(c120.936,99.814) 119.2,101.55 118.008,100.358 ; 120.167,66.801 cw(c120.684,66.801) v7@120.613,67.313 ; 120.167,66.98 120.904,66.243 ; v7@120.691,67.372 ccw(c121.624,66.964) 120.904,66.243 ; 120.941,66.243 ccw(c120.941,67.959) 122.154,66.746 ccw(c121.506,67.393) 122.422,67.393 ; v1@122.139,68.824 cw(c121.454,68.139) 122.422,68.139 ; v1@122.139,68.895 ccw(c121.465,69.58) 122.426,69.572 ; v1@122.138,72.634 cw(c121.376,71.885) 122.445,71.876 ; v1@122.164,70.044 cw(c121.516,69.406) 122.425,69.399 ; v1@122.164,70.114 ccw(c121.527,70.762) 122.436,70.755 ; v1@122.164,71.314 cw(c121.49,70.651) 122.435,70.643 ; v1@122.164,71.384 ccw(c121.502,72.058) 122.447,72.05 ; v1@122.194,72.623 cw(c122.514,71.878) 123.088,72.452 ; 122.25,75.286 122.25,73.29 122.795,72.746 123.088,72.452 ; v7@122.264,66.767 ccw(c122.556,67.462) 123.088,66.929 ; v7@122.422,67.094 122.422,69.127 122.43,70.077 122.441,71.347 122.452,72.667 122.452,72.746 v1@122.453,72.873 ; 118.008,97.409 118.008,100.358 ; 120.904,66.243 122.403,66.243 123.088,66.929 ; 123.088,66.929 123.088,72.452
  Top Layer w1: 120.117,66.888 cw(c120.642,66.888) v7(120.599,67.412) ; 120.117,67.637 cw(c121.644,67.637) v1@120.564,68.717 ; 120.117,68.577 ccw(c121.764,68.577) v7(120.599,67.412) ; 120.117,69.07 cw(c121.557,69.07) v1@120.538,70.089 ; 120.117,69.726 ccw(c121.644,69.726) v1@120.564,68.646 ; 120.117,70.34 cw(c121.557,70.34) v1@120.538,71.359 ; 120.117,71.036 ccw(c121.557,71.036) v1@120.538,70.018 ; 120.117,71.722 cw(c121.47,71.722) v1@120.513,72.679 ; 120.117,72.306 ccw(c121.557,72.306) v1@120.538,71.288 ; 120.117,73.566 ccw(c121.47,73.566) v1@120.513,72.609 ; 120.117,74.15 cw(c121.066,74.15) POWS.1@120.395,74.821 ; 120.303,73.822 120.303,74.223 POWS.1@120.117,74.409 ; 120.331,70.926 ccw(c121.008,70.602) v1@120.543,70.014 ; POWS.1@120.898,74.824 cw(c121.945,73.865) 121.945,75.286 ; v7@121.082,67.437 121.419,67.1 ; POWS.1@121.234,75.108 121.412,75.286 ; 121.673,66.904 cw(c121.673,66.123) v7(122.225,66.675) ; v7@121.826,66.904 cw(c121.826,68.638) v7(120.599,67.412) ; 121.945,75.196 121.945,75.286 ; v7@122.422,67.094 v7@122.063,66.735 ; POWS.1@120.117,74.409 120.117,67.208 120.421,66.904 121.895,66.904 v7@122.063,66.735 ; POWS.1@120.117,74.409 120.117,74.955 120.447,75.286 121.412,75.286 ; v7(120.599,67.412) cw(c120.662,66.343) 121.419,67.1 ; v7(120.599,67.412) ccw(c121.351,68.164) 121.351,67.1 cw(c121.351,68.164) v7(120.599,67.412) ; 121.412,75.286 121.945,75.286 ; 121.419,67.1 cw(c121.419,66.123) v7(122.225,66.675) ; 121.419,67.1 121.698,67.1 ; 121.698,67.1 cw(c121.698,66.561) v7(122.225,66.675) ; 121.698,67.1 v7@122.063,66.735 ; v7(122.225,66.675) cw(c122.225,67.595) 121.574,66.944 ccw(c122.225,67.595) v7(122.225,66.675)
  Bottom Layer w0.8: v2(114.706,95.433) 116.25,96.977 v2(117.577,96.977) ; v2(118.008,97.892) 120.946,97.892 122.762,96.076 122.762,76.457 121.943,75.638 122.098,75.483 122.098,73.355 ; v1@122.135,72.701 ccw(c121.75,73.007) 122.098,73.355 ; v1@122.139,68.824 cw(c121.072,67.758) 122.58,67.758 ; v1@122.139,68.895 ccw(c121.072,69.961) v1@122.58,69.961 ; v1@122.139,72.634 cw(c121.072,71.568) v1@122.58,71.568 ; v7@122.154,66.746 ccw(c121.125,67.775) 122.58,67.775 ; v1@122.164,70.043 cw(c121.159,69.038) v1@122.58,69.038 ; v1@122.164,70.114 ccw(c121.159,71.119) v1@122.58,71.119 ; v1@122.164,71.313 cw(c121.159,70.308) v1@122.58,70.308 ; v1@122.164,71.384 ccw(c121.159,72.389) 122.58,72.389 ; v1@122.184,72.62 cw(c122.386,71.612) 123.114,72.339 ; v7@122.58,66.802 122.58,66.853 122.58,72.39 ; 123.114,67.1 123.114,72.339 ; 122.098,73.355 123.114,72.339
  Bottom Layer w1: 120.091,73.627 ccw(c121.531,73.627) v1@120.513,72.609 ; 120.091,74.088 cw(c121.127,74.088) POWS.1@120.395,74.821 ; v1@120.513,72.679 cw(c121.715,71.477) 121.715,73.177 ; v1@120.521,72.602 cw(c121.058,73.406) 120.091,73.406 ; POWS.1@120.574,74.892 POWS.1@120.091,74.409 ; POWS.1@120.775,74.804 cw(c119.691,72.857) v1@121.92,72.857 ; POWS.1@120.832,74.991 ccw(c120.908,75.916) 121.564,75.26 ; POWS.1@120.914,74.849 cw(c121.564,74.541) 121.564,75.26 ; 121.012,66.414 cw(c122.01,67.412) v7(120.599,67.412) ; 121.068,73.177 cw(c121.068,71.564) v1@122.209,72.705 ; POWS.1@121.082,75.235 POWS.1@121.209,75.108 ; 121.412,75.108 121.564,75.26 ; 121.92,75.286 121.92,73.177 120.32,73.177 120.091,73.406 ; v7@122.071,66.802 cw(c122.071,68.883) v7(120.599,67.412) ; v7(122.225,66.675) cw(c121.183,67.715) 121.183,66.243 ; v7@122.58,66.802 v7@122.53,66.802 ; 122.828,67.1 122.58,66.853 v7@122.53,66.802 ; 120.091,67.107 ccw(c120.091,67.683) v7(120.599,67.412) ; 120.091,67.107 120.32,67.107 120.625,66.802 ; 120.091,67.107 120.396,66.802 ; 120.091,73.406 POWS.1@120.091,74.409 ; POWS.1@120.091,74.409 120.091,74.955 120.396,75.26 121.564,75.26 ; 120.396,66.802 120.955,66.243 ; 120.396,66.802 120.625,66.802 ; v7(120.599,67.412) ccw(c121.872,67.161) 120.955,66.243 ; 120.625,66.802 121.183,66.243 ; 120.625,66.802 v7@122.53,66.802 ; 120.955,66.243 121.183,66.243 ; 121.183,66.243 121.971,66.243 v7@122.53,66.802 ; 120.418,73.079 cw(c119.983,72.644) 120.598,72.644 ccw(c119.983,72.644) 120.418,73.079 ; 121.92,73.162 ccw(c122.667,73.162) 122.139,72.634 cw(c122.667,73.162) 121.92,73.162
  other v1: 120.599,68.682 122.174,68.859 120.574,70.053 122.199,70.079 120.574,71.323 122.199,71.349 120.548,72.644 122.174,72.669
8V: 
38BC1: BC1.1 pad.0@88.7,112.98 U1.20 | length 117.4
  Top Layer w0.254: 83.172,43.853 84.261,44.942 84.261,53.84 86.36,55.939 86.36,60.198 84.557,62.001 v2(83.693,62.001) ; v2@83.844,61.851 cw(c84.207,61.487) 84.207,62.001 cw(c84.207,62.516) v2@83.844,62.152 ; v2@87.808,89.484 87.833,89.51 v2(88.011,89.51) 88.011,88.875 90.608,86.278 ; v2@87.86,89.359 cw(c87.497,88.995) 88.011,88.995 cw(c88.525,88.995) v2@88.162,89.359 ; 89.23,82.637 ccw(c89.825,82.637) v2@89.404,82.216 ; 89.23,83.25 ccw(c90.438,83.25) v2@89.584,82.396 ; v2@89.251,82.355 ccw(c89.132,82.427) 89.23,82.525 ; v2@89.415,82.457 cw(c89.395,82.689) 89.23,82.525 ; v2(89.433,82.245) 89.433,82.321 89.23,82.525 ; U1.20@91.163,86.191 ccw(c90.953,85.981) 90.953,86.278 ccw(c90.953,86.574) U1.20@91.163,86.364 ; U1.20@91.775,86.278 90.215,86.278 89.23,85.293 89.23,82.525
  Top Layer w0.7: v2@82.111,43.644 cw(c82.615,43.14) 82.615,43.853 ; v2(82.118,43.637) 82.334,43.853 83.172,43.853
  Top Layer w0.8: 93.066,31.394 93.066,34.026
  Bottom Layer w0.254: v2@81.968,43.487 cw(c81.604,43.123) 82.118,43.123 cw(c82.632,43.123) v2@82.269,43.487 ; v2(82.118,43.637) 82.398,43.637 82.118,43.358 82.118,36.855 82.626,36.347 82.633,36.347 84.335,34.646 92.38,34.646 92.944,34.081 ; v2@83.542,62.152 ccw(c83.179,62.516) 83.693,62.516 ccw(c84.207,62.516) v2@83.844,62.152 ; v2(83.693,62.001) 83.693,62.865 82.702,63.856 82.702,77.067 86.179,80.543 87.732,80.543 v2(89.433,82.245) ; 87.808,89.901 ccw(c88.403,89.901) v2@87.982,89.481 ; 87.808,90.514 ccw(c89.016,90.514) v2@88.162,89.66 ; v2(88.011,89.51) 87.833,89.51 87.808,89.535 87.808,112.218 ; pad.0@88.078,112.941 cw(c87.149,112.876) 87.808,112.218 ; pad.0@88.52,112.422 ccw(c88.348,111.678) 87.808,112.218 ; pad.0@88.57,112.98 87.808,112.218 ; v2@89.22,82.245 cw(c88.706,82.245) 89.07,81.882 cw(c89.433,81.518) v2@89.433,82.032 ; BC1.1@92.794,33.32 ccw(c92.433,33.681) 92.944,33.681 ; BC1.1@92.944,32.8 92.944,34.081 ; BC1.1@93.279,33.333 cw(c93.947,34.081) 92.944,34.081
  Bottom Layer w0.8: 93.066,31.953 93.066,34.026
38BC2: BC2.2 pad.0@91,116.053 U1.21 | length 123.9
  Top Layer w0.254: v2@86.032,79.272 ccw(c85.668,79.635) 86.182,79.635 ccw(c86.696,79.635) v2@86.333,79.272 ; v2@86.182,79.223 86.182,85.42 84.811,86.792 84.811,96.571 88.138,99.898 88.138,109.296 90.449,111.608 91.643,111.608 92.256,112.22 92.256,115.694 91.923,116.027 ; U1.21@91.775,85.478 U1.21@91.807,85.446
  Top Layer w0.3: U1.21@91.807,85.446 v2@93.726,85.446 ; U1.21@92.371,85.548 ccw(c92.619,85.796) 92.619,85.446 ; v2@93.439,85.311 ccw(c93.115,84.987) 93.115,85.446 ccw(c93.115,85.904) v2@93.439,85.58
  Top Layer w0.6: pad.0@90.373,115.937 91.121,115.937 91.211,116.027 91.923,116.027 91.923,116.484 91.669,116.738 90.373,116.738 pad.0@90.373,115.937
  Top Layer w0.8: v2@81.583,34.648 ccw(c81.989,34.434) 81.664,34.109 ; v2@81.586,34.654 ccw(c81.924,34.426) 81.636,34.138 ; v2(81.636,34.62) 81.636,34.138 ; 81.664,31.4 81.664,34.109 ; 81.636,34.138 81.664,34.109
  Bottom Layer w0.254: v2@81.423,34.62 ccw(c80.908,34.62) 81.272,34.984 ccw(c81.636,35.347) v2@81.636,34.833 ; v2(81.636,34.62) 80.975,35.281 80.975,51.714 85.496,56.236 85.496,61.78 83.21,64.066 83.21,76.683 85.623,79.096 ; 85.729,79.096 cw(c85.729,78.668) v2@86.032,78.97 ; v2@86.028,79.268 cw(c85.623,79.657) 85.623,79.096 ; v2@86.153,79.092 ccw(c86.696,79.635) 86.696,78.867 ; v2@86.333,79.272 ccw(c87.31,80.248) 87.31,78.867 ; 93.066,84.735 ccw(c92.356,85.446) v2@93.361,85.446 ; v2@93.675,85.344 92.722,84.391 92.722,83.705 87.884,78.867 86.436,78.867 86.208,79.096 85.623,79.096
  Bottom Layer w0.6: pad.0@90.765,115.937 90.5,115.937 90.5,116.713 91.161,116.713 91.542,116.332 91.542,116.027 pad.0@90.958,116.027
  Bottom Layer w0.8: 81.664,31.4 v2@81.664,34.315
  other v2: 86.182,79.121 93.574,85.446
38OUT-1: pad.0@88.7,116.053 U1.22 | length 46.8
  Top Layer w0.254: v2(90.145,84.684) 90.151,84.678 U1.22@91.775,84.678 ; v2@90.295,84.533 cw(c90.644,84.184) 90.644,84.678 ; v2@90.295,84.834 ccw(c90.674,85.213) 90.674,84.678 ; U1.22@91.163,84.591 ccw(c90.953,84.381) 90.953,84.678 ccw(c90.953,84.974) U1.22@91.163,84.764
  Top Layer w0.6: pad.0@88.065,115.938 88.065,116.462 88.367,116.764 89.23,116.764 pad.0@89.23,115.951
  Bottom Layer w0.254: pad.0@88.8,116.053 87.58,116.053 86.741,115.214 86.741,87.147 89.205,84.684 v2(90.145,84.684) ; v2@89.994,84.533 ccw(c89.63,84.169) 89.63,84.684 ccw(c89.63,85.198) v2@89.994,84.834
  Bottom Layer w0.6: 87.398,115.828 87.507,115.937 ; 87.58,116.053 88.29,116.764 89.256,116.764 89.256,116.14 88.887,116.14 88.8,116.053 88.683,115.937 87.507,115.937 ; pad.0@88.35,116.318 cw(c87.507,117.06) 87.507,115.937
38OUT-2: pad.0@91.032,112.98 U1.19 | length 33.6
  Top Layer w0.254: v2@89.289,89.943 cw(c88.925,89.58) 89.439,89.58 cw(c89.953,89.58) v2@89.59,89.943 ; v2(89.439,90.094) 89.439,88.285 90.646,87.077 U1.19@91.775,87.077 ; U1.19@91.163,86.991 ccw(c90.953,86.781) 90.953,87.077 ccw(c90.953,87.374) U1.19@91.163,87.164
  Bottom Layer w0.254: v2@89.226,90.094 ccw(c88.712,90.094) 89.076,90.457 ccw(c89.439,90.821) v2@89.439,90.307 ; v2(89.439,90.094) 88.834,90.699 88.834,110.882 pad.0@90.932,112.98 ; 89.918,111.966 cw(c90.982,110.903) pad.0@90.982,112.407 ; 90.039,112.087 ccw(c89.146,112.98) pad.0@90.409,112.98 ; pad.0@90.352,112.4 cw(c90.982,111.77) pad.0@90.982,112.661
84-D: 
84ADC: Q1.2 R11.2 | length 10.6
  Top Layer w0.8: R11.2@108.55,84.932 109.265,84.932 109.906,85.573 ; R11.2@108.609,85.1 ccw(c108.749,86.729) 109.906,85.573 ; Q1.2@111.95,92.25 111.95,89.979 109.906,87.935 109.906,85.573
<Z: CMZ.3 U1.13 | length 25.2
  Top Layer w0.254: CMZ.3@94.231,72.443 ccw(c93.509,73.165) 94.53,73.165 ccw(c95.551,73.165) CMZ.3@94.829,72.443 ; v2@94.379,79.25 cw(c94.016,78.886) 94.53,78.886 cw(c95.044,78.886) v2@94.681,79.25 ; CMZ.3@94.53,71.944 v2(94.53,79.4) ; U1.13@95.313,89.29 cw(c95.097,89.075) 95.402,89.075 ; 95.402,89.086 cw(c95.691,89.086) U1.13@95.487,89.29 ; U1.13@95.402,89.891 95.402,87.528 96.368,86.563 v2(96.368,86.309) ; 95.824,87.106 cw(c95.027,86.309) v2@96.155,86.309 ; 96.258,86.673 cw(c95.894,86.309) v2@96.409,86.309
  Bottom Layer w0.254: v2@94.38,79.551 ccw(c94,79.934) 94.539,79.934 ; v2@94.539,79.578 94.539,79.934 ; 94.539,79.893 ccw(c95.023,79.893) v2@94.681,79.551 ; 96.19,85.366 cw(c97.311,85.366) v2@96.518,86.159 ; 96.19,85.979 cw(c96.698,85.979) v2@96.339,86.338 ; v2(96.368,86.309) 96.19,86.131 96.19,81.585 94.539,79.934
AM: CMZ.5 U1.15 | length 29.6
  Top Layer w0.254: 88.624,74.813 ccw(c89.052,75.241) v2@89.052,74.635 ; 88.716,74.721 cw(c88.417,74.422) v2@88.839,74.422 ; 88.722,86.055 ccw(c88.315,86.462) v2@88.89,86.462 ; 88.783,86.116 cw(c89.103,85.796) v2@89.103,86.249 ; v2@89.014,74.422 88.341,75.095 88.341,85.674 v2@89.129,86.462 ; v2@93.626,87.349 ccw(c93.263,87.712) 93.777,87.712 ccw(c94.291,87.712) v2@93.927,87.349 ; v2(93.777,87.198) U1.15@93.777,89.902 ; 93.777,89.024 cw(c94.153,89.024) U1.15@93.887,89.29
  Bottom Layer w0.254: v2@89.052,74.209 cw(c89.052,73.695) 89.416,74.058 cw(c89.78,74.422) v2@89.265,74.422 ; v2(89.052,74.422) 90.53,72.944 ; v2@89.103,86.675 ccw(c89.103,87.25) 89.51,86.843 ; v2@89.129,86.462 89.865,87.198 v2(93.777,87.198) ; v2@89.316,86.462 cw(c89.769,86.462) 89.449,86.782 ; CMZ.5@90.292,72.493 ccw(c89.984,72.944) 90.53,72.944 ; CMZ.5@90.53,71.944 90.53,72.944 ; CMZ.5@90.768,72.493 cw(c91.076,72.944) 90.53,72.944 ; v2@93.626,87.048 ccw(c93.263,86.684) 93.263,87.198 ccw(c93.263,87.712) v2@93.626,87.349
  other v2: 89.103,86.462
AM-D: 
BH: BH.1 U1.25 | length 67.1
  Top Layer w0.254: v2@85.249,69.364 cw(c84.886,69) 85.4,69 cw(c85.914,69) v2@85.551,69.364 ; v2(85.4,69.515) 85.4,62.047 86.944,60.503 86.944,55.805 84.769,53.63 84.769,41.698 85.395,41.072 85.395,36.144 86.582,34.957 87.141,34.957 88.066,34.032 ; v2@90.17,69.682 ccw(c90.17,70.196) 90.534,69.833 ; v2(90.17,69.723) 90.424,69.723 91.516,70.815 91.516,79.4 92.761,80.645 92.761,81.613 U1.25@93,81.853 ; v2@90.17,69.936 ccw(c90.17,71.063) 90.967,70.266 ; 92.761,80.604 cw(c93.541,80.604) U1.25@93.074,81.229 ; U1.25@92.761,81.111 cw(c93.162,81.111) U1.25@92.922,81.432 ; U1.25@92.761,81.618 cw(c92.783,81.618) U1.25@92.77,81.636
  Top Layer w0.8: 88.163,31.953 88.163,34.026
  Bottom Layer w0.254: v2@85.371,69.544 cw(c85.804,69.11) 85.804,69.723 ; v2@85.4,69.291 v2(85.4,69.515) 85.608,69.723 v2(90.17,69.723) ; v2@85.551,69.364 cw(c86.417,68.497) 86.417,69.723 ; v2@90.019,69.572 ccw(c89.656,69.209) 89.656,69.723 ccw(c89.656,70.237) v2@90.019,69.874
  Bottom Layer w0.8: 88.163,31.471 88.163,33.757
BI-R: U1.28 U2.2 | length 26.8
  Top Layer w0.254: U1.28@95.313,81.241 cw(c94.852,80.78) 95.504,80.78 ; v2@95.353,75.741 ccw(c94.99,76.105) 95.504,76.105 ccw(c96.018,76.105) v2@95.655,75.741 ; U1.28@95.4,81.853 95.504,81.749 v2(95.504,75.59)
  Top Layer w0.6: U2.2@107.854,74.092 v2(109.372,74.092)
  Bottom Layer w0.254: v2@95.475,75.619 cw(c96.202,74.892) 96.202,75.921 ; v2(95.504,75.59) 95.834,75.921 106.832,75.921 108.661,74.092 v2(109.372,74.092) ; v2@95.655,75.44 cw(c96.815,74.279) 96.815,75.921 ; v2@109.222,73.941 ccw(c108.858,73.578) 108.858,74.092 ccw(c108.858,74.606) v2@109.222,74.242